# Altium PCB PCB1.PcbDoc
Units mil, origin at the board's own origin, x right, y up, seen from the top; angles counter-clockwise.
Board outline 2755.91 x 2362.2 mil, 2 copper layers (Top Layer, Bottom Layer); 18 components, 17 nets, 104 pads, 0 vias.
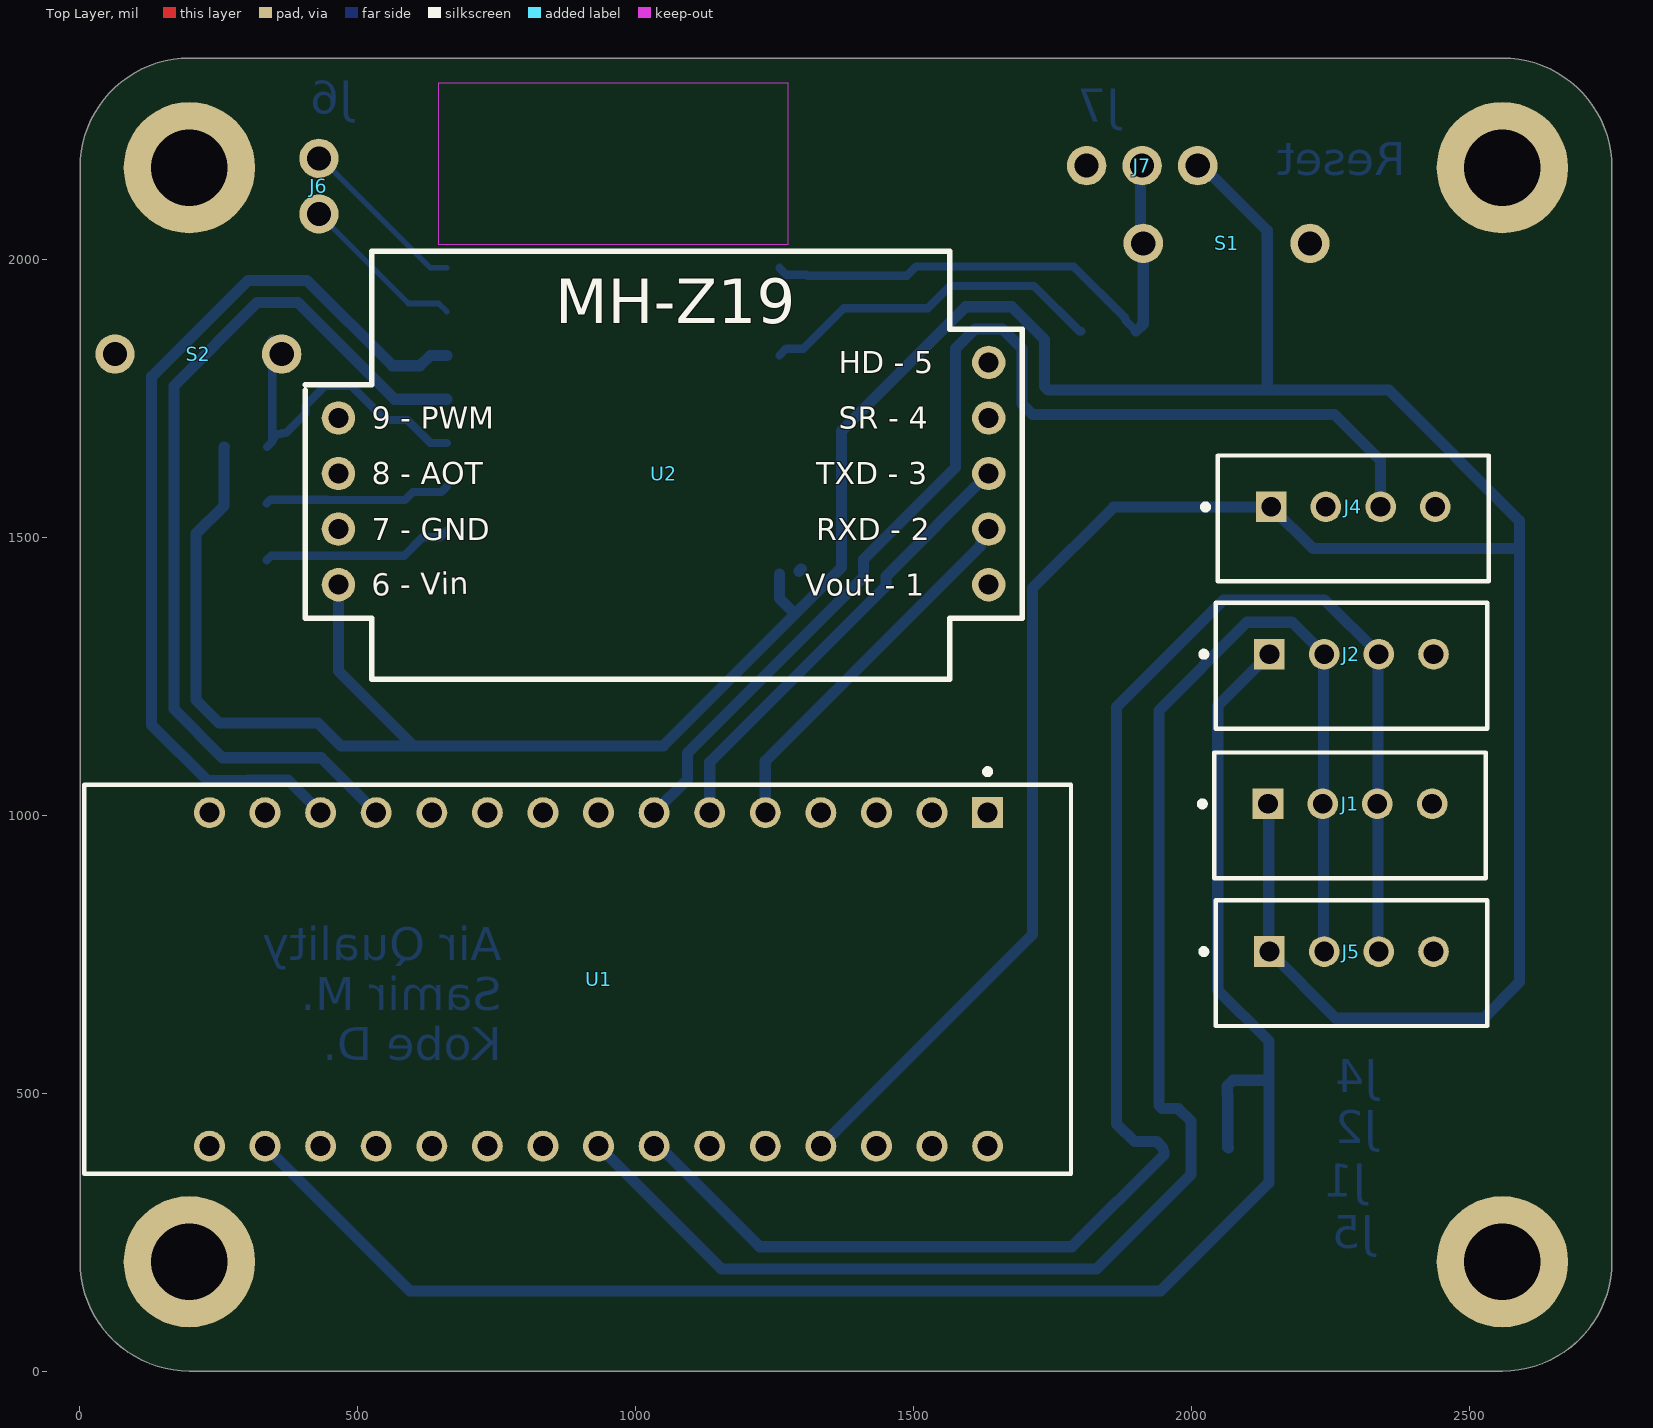
[diagram p0: Top Layer view]
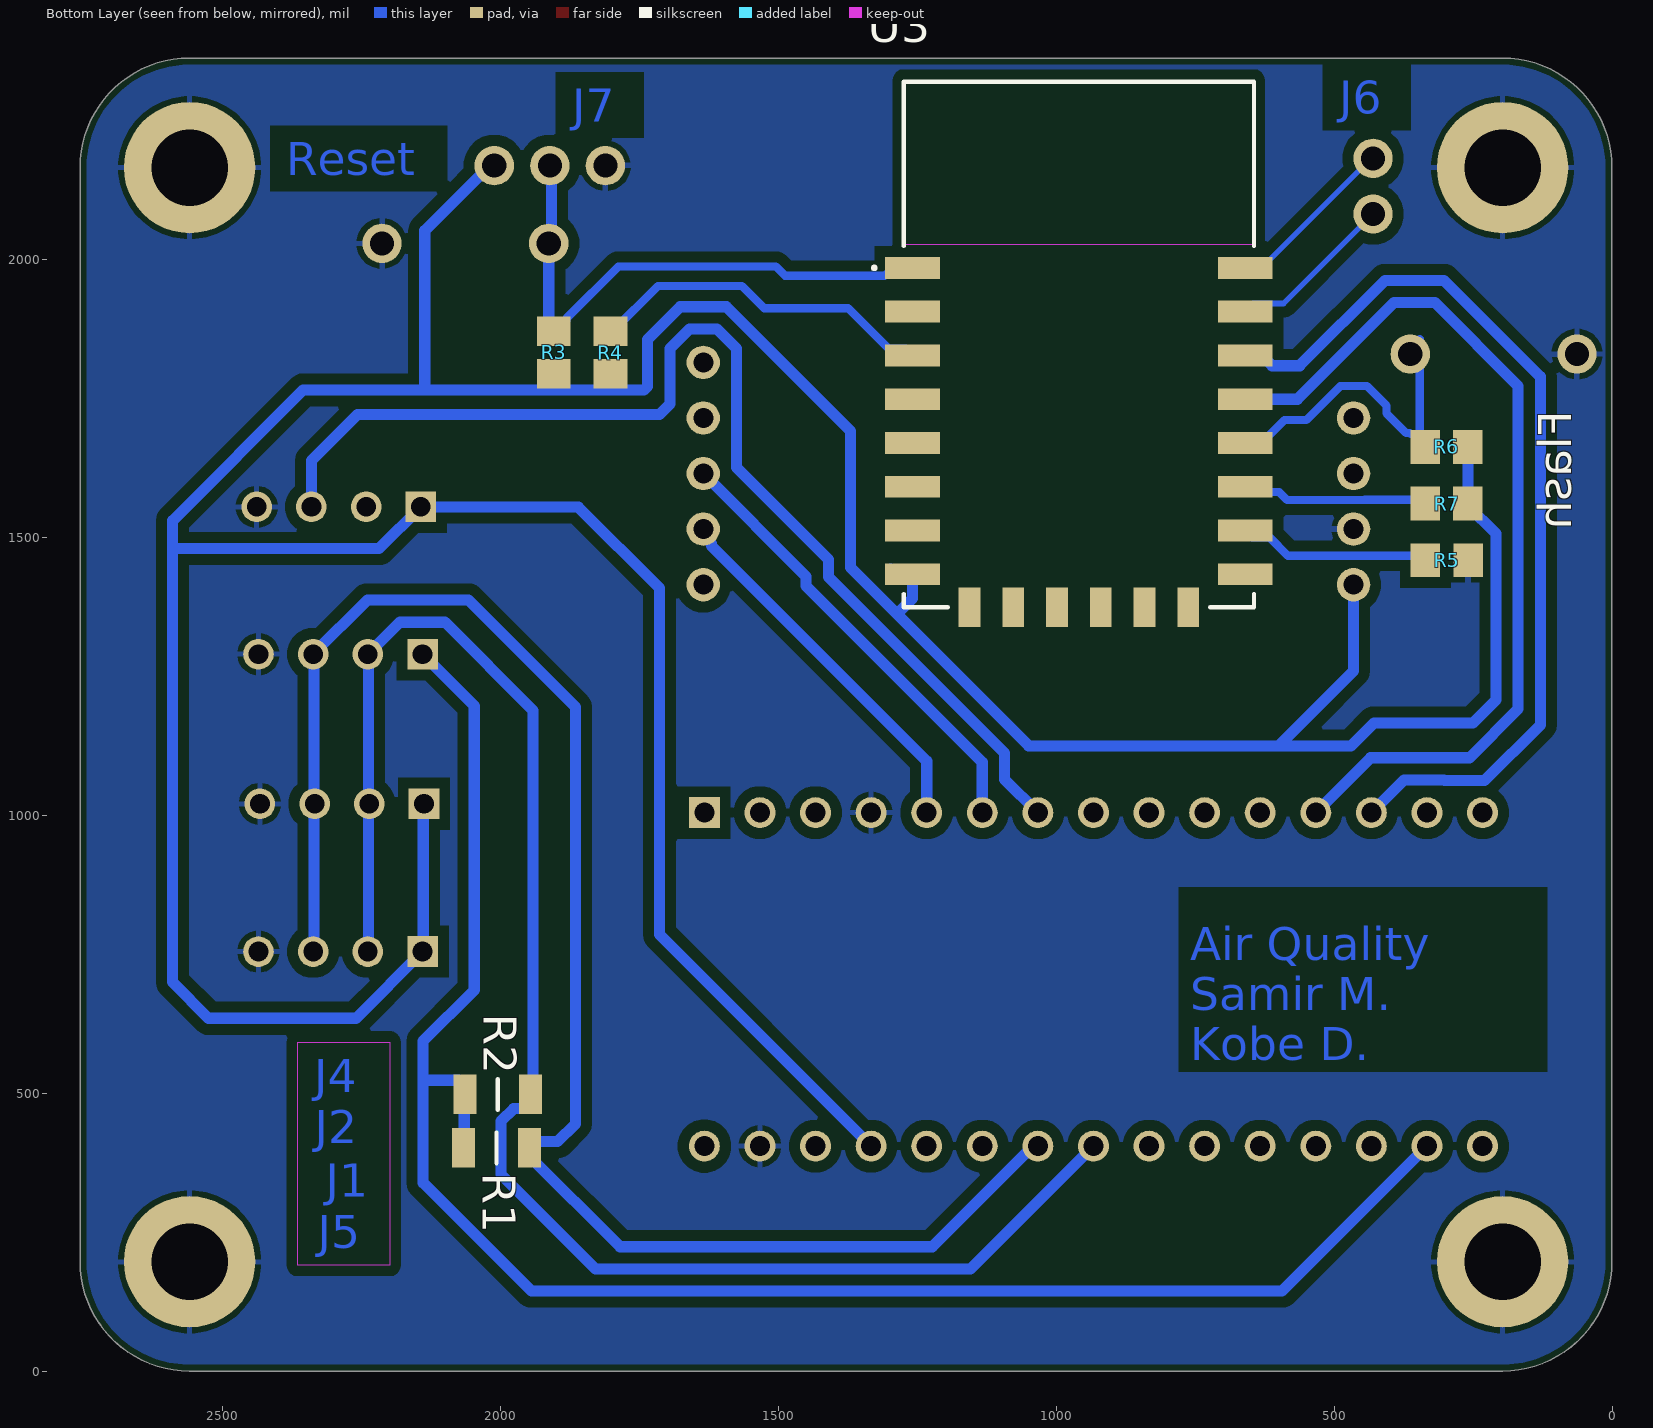
[diagram p1: Bottom Layer view, seen from below]
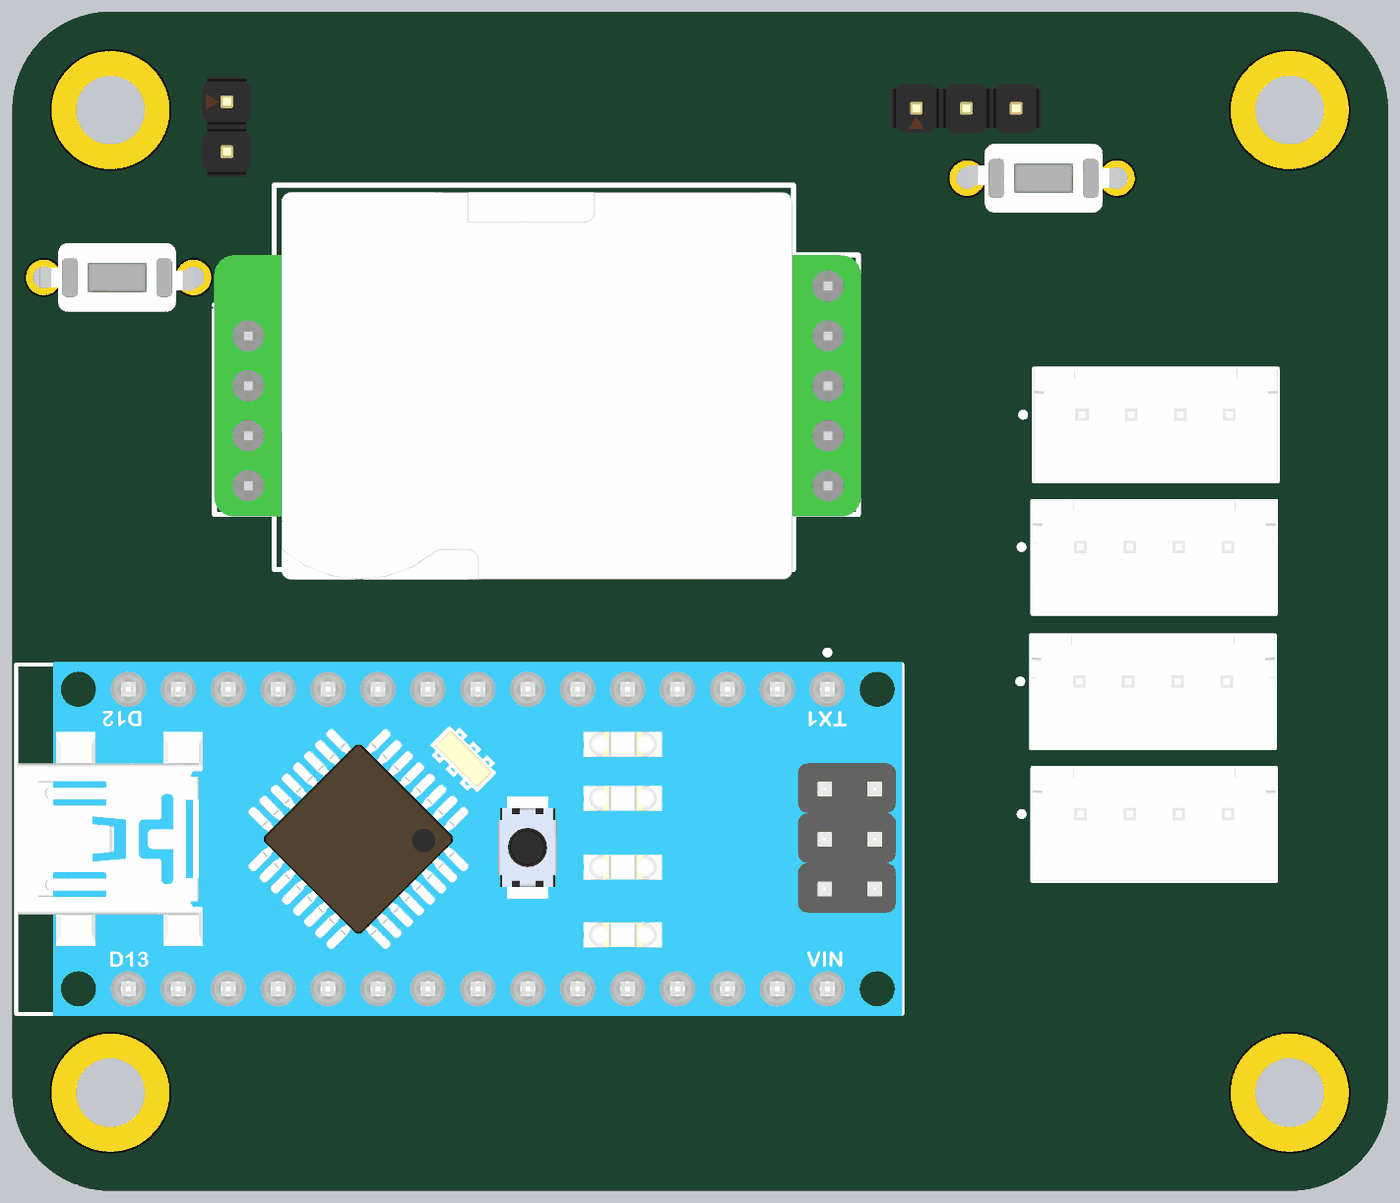
[diagram p2: 3D render of the assembled board from above, using the file's embedded part models]

## Layer stack, top to bottom
Top Solder: solder mask 0.4, Solder Resist, Dk 3.5
Top Layer: signal copper 1.4
Dielectric 1: dielectric 12.6, FR-4, Dk 4.8
Bottom Layer: signal copper 1.4
Bottom Solder: solder mask 0.4, Solder Resist, Dk 3.5

## Board outline
197.1,0.25 cw(c197.1,197.1) 0.25,197.1 0.25,2165.6 cw(c197.1,2165.6) 197.1,2362.45 2559.31,2362.45 cw(c2559.31,2165.6) 2756.16,2165.6 2756.16,197.1 cw(c2559.31,197.1) 2559.31,0.25

## Design rules (kind name [scope] priority, off if disabled: settings)
BoardOutlineClearance [All] p1: gap=11.81 ignorepadtopadclearanceinfootprint=FALSE
Clearance [All] p1: gap=20 ignorepadtopadclearanceinfootprint=FALSE
PolygonConnect [All] p1: connectstyle=Relief reliefconductorwidth=10 reliefentries=4 polygonreliefangle="90 Angle" airgapwidth=10
RoutingVias [All] p1: holewidth=28 width=50 viastyle="Through Hole" minholewidth=28 minwidth=50 maxholewidth=28 maxwidth=50
SolderMaskExpansion [All] p1: expansion=4 istentingtop=FALSE
Width [All] p1: maxlimit=50 minlimit=10 preferedwidth=10
30 further rules are at their usual default settings.

## Classes and differential pairs
component class CPU: J6 J7 R1 R2 R3 R4 R5 R6 R7 S1 S2 U1 U2 U3
component class Connectors: J2 J4 J5

## Components (designator, comment, footprint, x,y, rotation, side; value= is the part's Value field where it differs from the comment)
J1 "B4B-XH-A(LF)(SN)" FP-B4B-XH-A_LF_SN-MFG 2285,1000 r180 top
J2 "B4B-XH-A(LF)(SN)" FP-B4B-XH-A_LF_SN-MFG 2287.64,1269.33 r180 top
J4 "B4B-XH-A(LF)(SN)" FP-B4B-XH-A_LF_SN-MFG 2290.79,1534.33 r180 top
J5 "B4B-XH-A(LF)(SN)" FP-B4B-XH-A_LF_SN-MFG 2287.64,734.33 r180 top
J6 "conn1x02" conn1x02 430,2182 r270 top
J7 "conn1x03" conn1x03 1811,2169 r0 top
R1 "4K7" 1206 2007,402 r0 bottom
R2 "4K7" 1206 2005,498 r0 bottom
R3 "10K" RESC2013X70X40ML20T20 1904,1833 r270 bottom
R4 "10K" RESC2013X70X40ML20T20 1802,1832.61 r270 bottom
R5 "10K" RESC2013X70X40ML20T20 297.39,1459 r180 bottom
R6 "10K" RESC2013X70X40ML20T20 298,1663 r180 bottom
R7 "10K" RESC2013X70X40ML20T20 297.61,1561 r180 bottom
S1 "Reset" Switch 2063,2029 r0 top
S2 "Flash" Switch 213,1830 r180 top
U1 "A000005" FP-A000005-MFG 895.5,705 r270 top
U2 "MH-Z19C" MH-Z19 1050,1630 r0 top
U3 "esp-12f" esp12f 959.21,1847.2 r180 bottom

## Footprints (in the part's own frame and the unit in brackets; to place one, negate y for a bottom-side part, rotate by r counter-clockwise, add the part's x,y. Pads: shape width x height; smd on the part's side, far side on the other; paste and mask are expansions set on the pad)
1206 [mm]
  rect 1.05x1.8 smd: 1(-1.5,0) 2(1.5,0)
  silkscreen extent 0,-0.7 0,0.7, body extent -1.42,-0.74 1.78,0.86, height 0.55
conn1x02 [mm]
  round 1.8 hole 1.1: 1(0,0) 2(2.54,0)
  body extent -1.27,-1.25 3.81,1.25, height 8.55
conn1x03 [mm]
  round 1.8 hole 1.1: 1(0,0) 2(2.54,0) 3(5.08,0)
  body extent -1.27,-1.25 6.35,1.25, height 8.55
esp12f [mm]
  rect 2.5x1 smd: 1(-7.6,3.5) 2(-7.6,1.5) 3(-7.6,-0.5) 4(-7.6,-2.5) 5(-7.6,-4.5) 6(-7.6,-6.5) 7(-7.6,-8.5) 8(-7.6,-10.5) 15(7.6,-10.5) 16(7.6,-8.5) 17(7.6,-6.5) 18(7.6,-4.5) 19(7.6,-2.5) 20(7.6,-0.5) 21(7.6,1.5) 22(7.6,3.5)
  rect 1x1.8 smd: 9(-5,-12) 10(-3,-12) 11(-1,-12) 12(1,-12) 13(3,-12) 14(5,-12)
  Top Layer keep-out region: -8.001,12.065 7.991,12.065 7.991,4.554 -8.001,4.554
  Bottom Layer keep-out region: -8.001,11.938 8.001,11.938 8.001,4.572 -8.001,4.572
  silkscreen extent -9.4,-12 8,12, body extent -8,-12 8,12, height 3.1
FP-A000005-MFG [mil]
  rect 55.67x55.67 hole 35.98 paste-99999 mask+0: 1(-300,737.5)
  round 55.67 hole 35.98 paste-99999 mask+0: 2(-300,637.5) 3(-300,537.5) 4(-300,437.5) 5(-300,337.5) 6(-300,237.5) 7(-300,137.5) 8(-300,37.5) 9(-300,-62.5) 10(-300,-162.5) 11(-300,-262.5) 12(-300,-362.5) 13(-300,-462.5) 14(-300,-562.5) 15(-300,-662.5) 16(300,-662.5) 17(300,-562.5) 18(300,-462.5) 19(300,-362.5) 20(300,-262.5) 21(300,-162.5) 22(300,-62.5) 23(300,37.5) 24(300,137.5) 25(300,237.5) 26(300,337.5) 27(300,437.5) 28(300,537.5) 29(300,637.5) 30(300,737.5)
  silkscreen extent -379,-888 350,888, body extent -354,-891 354,891, height 10
FP-B4B-XH-A_LF_SN-MFG [mm]
  rect 1.4x1.4 hole 0.9 paste-2539.97 mask+0: 1(3.75,-0.525)
  round 1.4 hole 0.9 paste-2539.97 mask+0: 2(1.25,-0.525) 3(-1.25,-0.525) 4(-3.75,-0.525)
  silkscreen extent -6.2,-2.88 6.87,2.88, body extent -6.3,-2.98 6.3,2.98, height 0.25
MH-Z19 [mil]
  round 60 hole 36 paste-99999 mask+2: 1(585,-215) 2(585,-115) 3(585,-15) 4(585,85) 5(585,185) 6(-585,-215) 7(-585,-115) 8(-585,-15) 9(-585,85)
  silkscreen extent -645,-385 645,385, body extent -645,-405 650,371, height 437
RESC2013X70X40ML20T20 [mm] "Chip Resistor, 2-Leads, Body 2.00x1.25mm, IPC Low Density"
  rect 1.35x1.55 smd: 1(-0.975,0) 2(0.975,0)
  body extent -1.1,-0.72 1.1,0.72, height 0.7
Switch [mm]
  round 1.8 hole 1.1: 1(-3.81,0) 2(3.81,0)
  body extent -3.84,-1.75 3.99,1.75, height 5.9

## Part data
J1 J2 J4 J5: library part CMP-17439-000250-1, "CONN HEADER VERT 4POS 2.5MM", Color=Natural, Contact Resistance=20mR, Current Rating=3A, Flammability Rating="UL94 V-0", Housing Color=White, Insulation Resistance=1GR, Max Operating Temperature=85°C, Max Voltage Rating (AC)=250V, Min Operating Temperature=-25°C, Package Quantity=500, Connector Type=Header, Contact Finish - Mating=TIN, Contact Material=Brass, Contact Plating=Tin, Contact Shape=Square, Contact Type="Male Pin", Depth=5.75mm, Fastening Type=Detent, Gender=Male, Housing Material=Polyamide, Insulation Color=Natural, Insulation Material=Nylon, Lead Free="Lead Free", Lead Pitch=2.5mm, Length=12.4mm, Mated Stacking Heights=9.8mm, Material=Polyamide, Max Current Rating=3A, Max Voltage Rating (DC)=250V, Mount="Through Hole", Number of Contacts=4, Number of Positions=4, Number of Rows=1, Orientation=Straight, Packaging=Bulk, Pitch=2.5mm, REACH SVHC="No SVHC", Series=XH, Termination=Solder, Voltage Rating=250V, Voltage Rating (AC)=250V, Wire/Cable Gauge=22AWG
R1 R2: library part CMP-2001-04375-5, Manufacturer=Panasonic, Max Operating Temperature="155 degC", Min Operating Temperature="-55 degC", Package Quantity=1, Voltage Rating="150 V", ComponentLink1Description="Manufacturer URL", ComponentLink1URL=http://www.panasonic.com/, ComponentLink2Description=Datasheet, ComponentLink2URL=http://industrial.panasonic.com/cdbs/www-data/pdf/RDA0000/AOA0000C86.pdf, DatasheetVersion=04/2015, Height="0.6 mm", Length="2 mm", Mount="Surface Mount", Mounting Technology="Surface Mount", PackageDescription="2-Pin Surface Mount Device, Body 2 x 1.25 mm", PackageReference=0805, Packaging="Cut Tape", REACH SVHC=Yes, RoHSCompliant=true
R3 R4 R5 R6 R7: library part CMP-2001-04375-5, "Chip Resistor, 1 KOhm, +/- 1%, 0.125 W, -55 to 155 degC, 0805 (2012 Metric), RoHS, Tape and Reel", Manufacturer=Panasonic, Max Operating Temperature="155 degC", Min Operating Temperature="-55 degC", Package Quantity=1, Voltage Rating="150 V", ComponentLink1Description="Manufacturer URL", ComponentLink1URL=http://www.panasonic.com/, ComponentLink2Description=Datasheet, ComponentLink2URL=http://industrial.panasonic.com/cdbs/www-data/pdf/RDA0000/AOA0000C86.pdf, DatasheetVersion=04/2015, Height="0.6 mm", Length="2 mm", Mount="Surface Mount", Mounting Technology="Surface Mount", PackageDescription="2-Pin Surface Mount Device, Body 2 x 1.25 mm", PackageReference=0805, Packaging="Cut Tape", REACH SVHC=Yes, RoHSCompliant=true
S1 S2: library part Switch
U1: library part CMP-189986-000002-1, "ARDUINO NANO ATMEGA328 EVAL BRD", Operating Supply Voltage=12V, Package Quantity=50, Core Architecture=AVR, Data Bus Width=8b, Evaluation Kit=Yes, Height=0.25inch, Interface=I2C, Length=7inch, Number of Bits=8, Packaging=Bulk, REACH SVHC="No SVHC", Series="AVR® ATmega", Weight=0.358383oz, Width=5inch
U3: "Integrated Circuit", Manufacturer_Name=Ai-Thinker, Datasheet Link=https://docs.ai-thinker.com/_media/esp8266/docs/esp-12f_product_specification_en.pdf, Height=3.1mm, Manufacturer_Part_Number=esp-12f

## Free pads (board coordinates)
  round 236.22 hole 137.8: Mount(196.85,196.85) Mount(196.85,2165.35) Mount(2559.06,196.85) Mount(2559.06,2165.35)

## Nets (pads, with @x,y where several pads share a name; then routed paths per layer and width w, separated by ;. In a path a pad name is that pad's centre, name@x,y a point inside that pad or via, vN(x,y) a via of type N, cw(c..) or ccw(c..) an arc to the next point about the centre after c; other vN are vias at no path point)
+3: J2.1 R1.2 R2.2 U1.17 | length 3213.7
  Bottom Layer w20: U1.17 594,144 1944,144 2139.15,339.15 2139.15,523.43 ; R1.2 2065.06,403 2065.06,497 R2.2 2064.06,512.76 2074.72,523.43 2139.15,523.43 ; J2.1 2047,1197 2047,686 2139.15,593.85 2139.15,523.43
+5: J1.1 J4.1 J5.1 J7.3 R3.2 R4.2 R6.2 R7.2 U1.27 U2.6 U3.8 | length 8226.3
  Bottom Layer w20: R6.2 259.42,1662.81 259.42,1561.19 R7.2 259.23,1557.06 209,1506.83 209,1207.85 250.43,1166.43 428.14,1166.43 469.57,1125 600,1125 ; U2.6 465,1260 600,1125 ; U3.8 1258.43,1390.57 1286.67,1362.33 ; U3.8@1293.39,1439.25 U3.8@1297.64,1443.5 ; U1.27 1714,786 1714,1409 1860,1555 J4.1 2218.15,1480 2590,1480 ; J7.3@2009,2179 2136,2052 2136,1765 ; J1.1 2138.68,1019.35 2138.68,756.32 J5.1 2260,635 2525,635 2590,700 2590,1480 ; 600,1125 1049.35,1125 1286.67,1362.33 ; 1286.67,1362.33 1370,1445.65 1370,1691.42 1593.58,1915 1676.42,1915 1735,1856.42 1735,1771.49 1741.49,1765 2136,1765 ; 2136,1765 2355,1765 2590,1530 2590,1480
ESP-RX: U1.12 U3.19 | length 1645.5
  Bottom Layer w20: U1.12@531.66,1006.34 434.35,1103.65 256.63,1103.65 169,1191.28 169,1772.54 318.9,1922.43 391.92,1922.43 565.57,1748.78 U3.19
ESP-TX: U1.13 U3.20 | length 1670.3
  Bottom Layer w20: U1.13 374.35,1063.65 302.17,1063.65 301.35,1062.83 229.17,1062.83 129,1163 129,1789.1 302.33,1962.43 408.49,1962.43 561.92,1809 611.95,1809 630.47,1827.52 U3.20
GND: J1.4 J2.4 J4.4 J5.4 J7.1 pad.Mount R5.2 S1.2 S2.2 U1.4 U1.29 U2.7
NetJ6_1: J6.1 U3.22 | length 311.6
  Bottom Layer w10: J6.1 433.47,2182 630.47,1985 U3.22
NetJ6_2: J6.2 U3.21 | length 302.8
  Bottom Layer w10: J6.2 591.06,1920.94 645.31,1920.94 U3.21
NetJ7_2: J7.2 R3.1 S1.1 U3.1 | length 1016.7
  Bottom Layer w10: S1.1@1908,2034 S1.1
  Bottom Layer w15: U3.1 1270.61,1972.81 1307.11,1972.81 1308.92,1971 1488.05,1971 1504.54,1987.5 1787.89,1987.5 1880.99,1894.4 1880.99,1890.46 R3.1@1900.06,1871.39
  Bottom Layer w20: R3.1@1900.06,1871.39 1913,1884.32 S1.1 ; S1.1@1908,2034 J7.2@1908,2176
NetR4_1: R4.1 U3.3 | length 629.1
  Bottom Layer w15: U3.3 1270.61,1839.7 1301.7,1839.7 1374.5,1912.5 1525.53,1912.5 1565.53,1952.5 1716.56,1952.5 1798.06,1871 R4.1
NetR5_1: R5.1 U3.16 | length 346.4
  Bottom Layer w15: R5.1 343.77,1467 583,1467 616.37,1500.37 647.81,1500.37 U3.16
NetR6_1: R6.1 S2.1 U3.18 | length 606.2
  Bottom Layer w15: R6.1 R6.1@346,1672.61 ; S2.1@346,1857 R6.1@346,1672.61 ; U3.18 630.47,1670.04 589.23,1711.28 550.04,1711.28 488.82,1772.5 441.18,1772.5 405.82,1737.14 405.82,1723.36 370.46,1688 364.25,1688 362.26,1686.01 355.46,1686.01 346,1676.55 R6.1@346,1672.61
NetR7_1: R7.1 U3.17 | length 337
  Bottom Layer w15: R7.1 343,1568 444.82,1568 445.32,1567.5 584.5,1567.5 598.79,1581.79 650.49,1581.79 U3.17
PPD-P1: J4.3 U1.7 | length 2078.8
  Bottom Layer w20: U1.7 1093,1065 1093,1112.08 1410,1429.08 1410,1460.71 1575,1625.71 1575,1839.85 1610.15,1875 1659.85,1875 1695,1839.85 1695,1739.85 1713.85,1721 2257.28,1721 2340,1638.28 J4.3
RX: U1.5 U2.2 | length 676.5
  Bottom Layer w20: U1.5 1233,1098 1620.07,1485.07 1620.07,1489.25 1635,1504.18 U2.2
SCL: J1.3 J2.3 J5.3 R1.1 U1.24 | length 3046.3
  Bottom Layer w20: U1.24 1042,405 1223,224 1784.71,224 1950,389.29 R1.1@1950,395 ; R1.1 1947.94,402.34 1937.28,413.01 1896.99,413.01 1865,445 1865,1195 2057.56,1387.56 2239.29,1387.56 J2.3 2335.53,1288.68 2335.53,1021.99 J1.3 2335.53,1019.35 2335.53,756.32 J5.3
SDA: J1.2 J2.2 J5.2 R2.1 U1.23 | length 3027.3
  Bottom Layer w20: U1.23 1154,184 1828.47,184 1998.61,354.14 1998.61,449.86 1975.91,472.57 1946.72,472.57 1941,478.29 1941,1188.54 2100.01,1347.56 2180.87,1347.56 J2.2 2237.11,1288.68 2237.11,1021.99 J1.2 2237.11,1019.35 2237.11,756.32 J5.2
TX: U1.6 U2.3 | length 817.9
  Bottom Layer w20: U1.6 1133,1095.51 1450,1412.51 1450,1430 U2.3
pads on no net: J4.2 U1.1 U1.2 U1.3 U1.8 U1.9 U1.10 U1.11 U1.14 U1.15 U1.16 U1.18 U1.19 U1.20 U1.21 U1.22 U1.25 U1.26 U1.28 U1.30 U2.1 U2.4 U2.5 U2.8 U2.9 U3.2 U3.4 U3.5 U3.6 U3.7 U3.9 U3.10 U3.11 U3.12 U3.13 U3.14 U3.15

## Polygon pours and split planes (outlines as drawn)
GND on Bottom Layer "NONET_L-01_P-001" (solid, remove dead copper, pour order 0): 126.78,2362.45 0,2260.18 0,0 2649.34,0 2756.16,121.43 2756.16,2362.45

## Keep-outs
Bottom Layer:
  rectangle: 2199.02,191.01 2364.98,591.99

## Other copper
Bottom Layer:
  text "Air Quality / Samir M. / Kobe D." at 759.25,559.04 h60

## Silkscreen, mask and mechanical layers (free items; w line width, h text height)
Mechanical 2:
  circle w0.5: c197.1,197.1 r78.74
  circle w0.5: c2559.31,2165.6 r78.74
  circle w0.5: c2559.31,197.1 r78.74
  circle w0.5: c197.1,2165.6 r78.74
  lines w0.5: 0.25,197.1 ccw(c197.1,197.1) 197.1,0.25 2559.31,0.25 ccw(c2559.31,197.1) 2756.16,197.1 2756.16,2165.6 ccw(c2559.31,2165.6) 2559.31,2362.45 197.1,2362.45 ccw(c197.1,2165.6) 0.25,2165.6 0.25,197.1

## Text inside footprints (layer, text, board x,y; h text height)
U2: Top Overlay "Vout - 1" at 1305,1395.32 h39.37; Top Overlay "RXD - 2" at 1325,1495.32 h39.37; Top Overlay "TXD - 3" at 1325,1595.32 h39.37; Top Overlay "SR - 4" at 1365,1695.32 h39.37; Top Overlay "HD - 5" at 1365,1795.32 h39.37; Top Overlay "6 - Vin" at 525.34,1395.32 h39.37 r1; Top Overlay "7 - GND" at 525,1495.32 h39.37; Top Overlay "8 - AOT" at 525,1595.32 h39.37; Top Overlay "9 - PWM" at 525,1695.32 h39.37; Top Overlay "MH-Z19" at 855,1885 h80